# Altium PCB 美安微波红外报警探测-CS1237-V1.5.PCBDOC
Units mil, origin at the board's own origin, x right, y up, seen from the top; angles counter-clockwise.
Board outline 2360 x 2720.05 mil, 2 copper layers (Top Layer, Bottom Layer); 73 components, 50 nets, 205 pads, 60 vias.
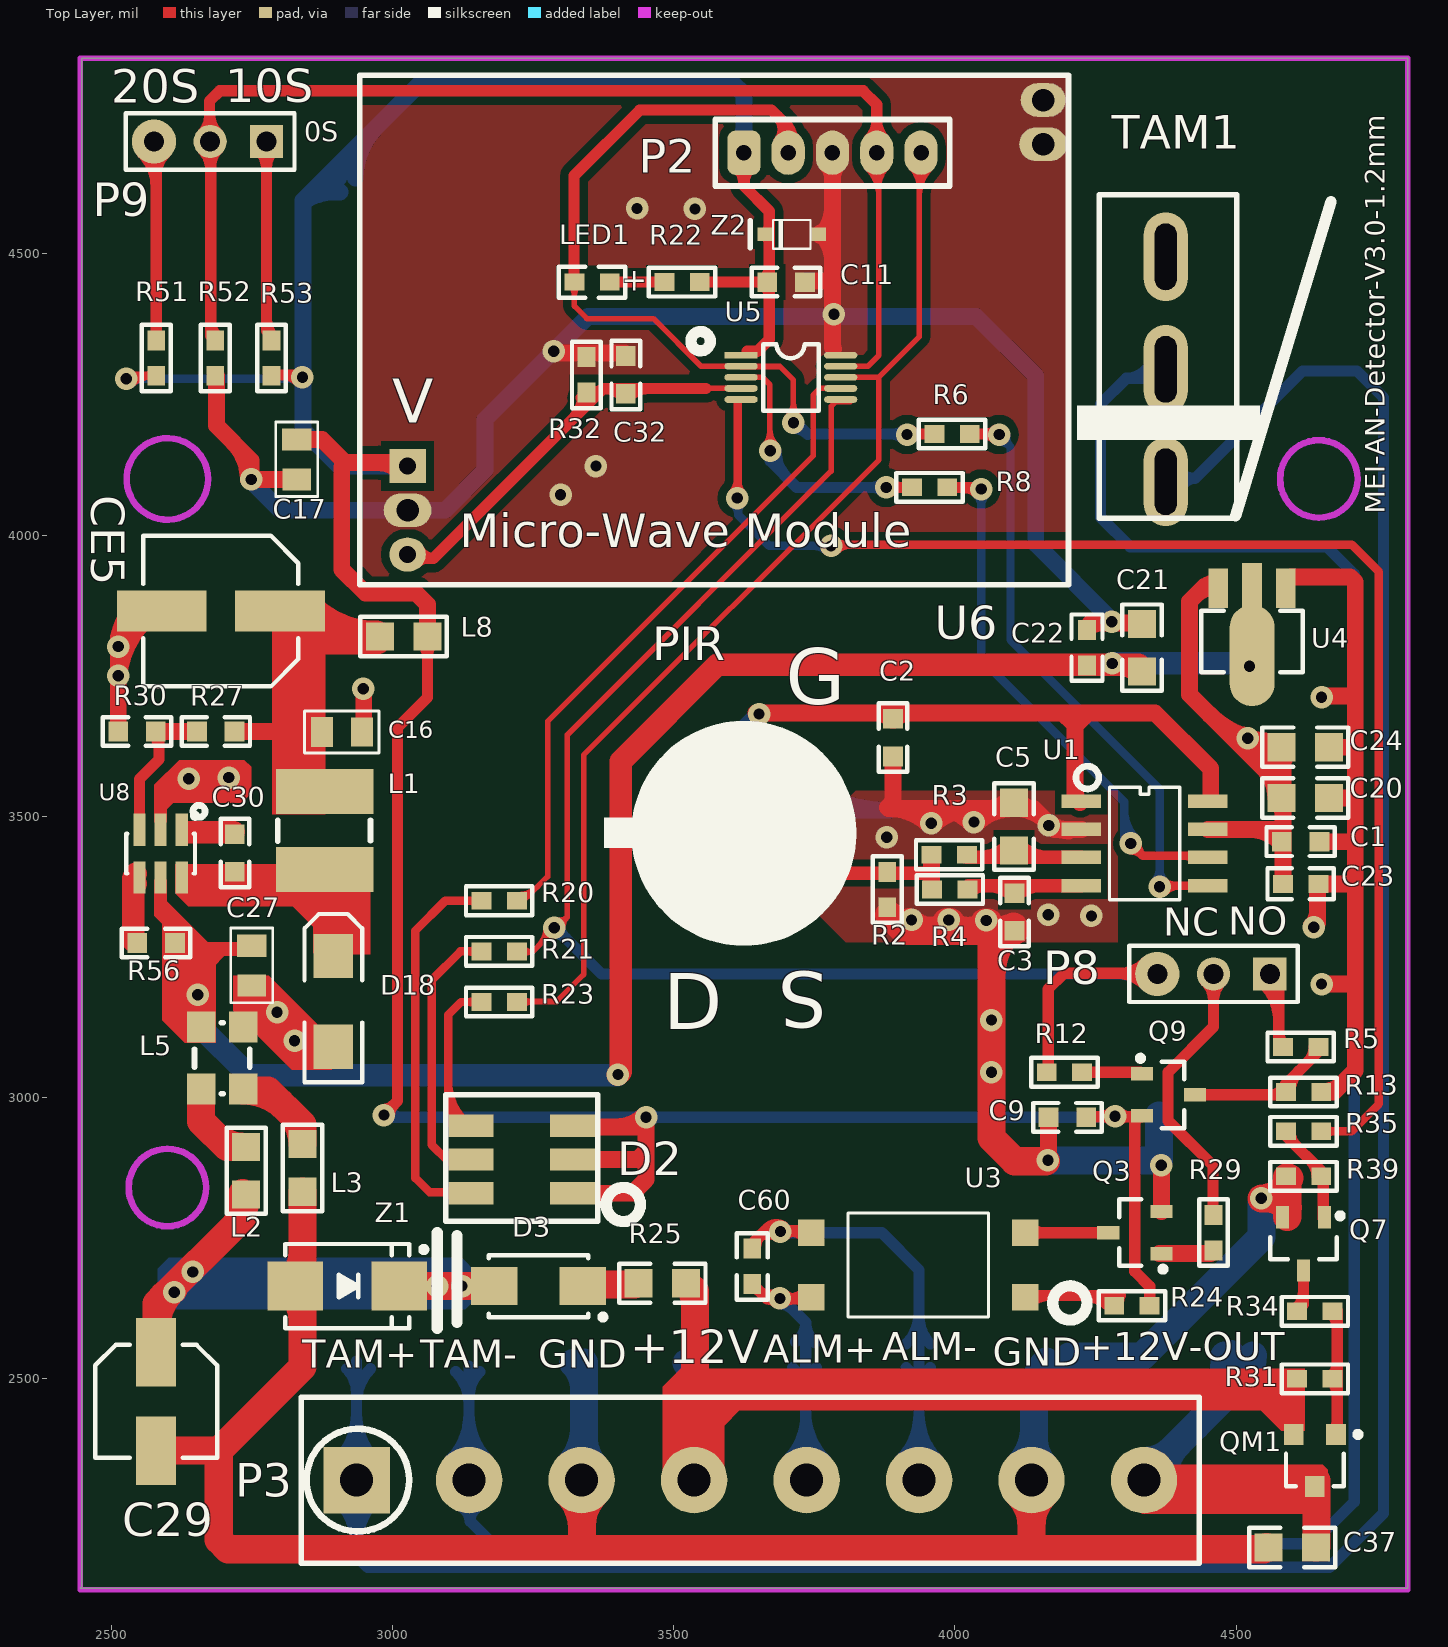
[diagram p0: Top Layer view]
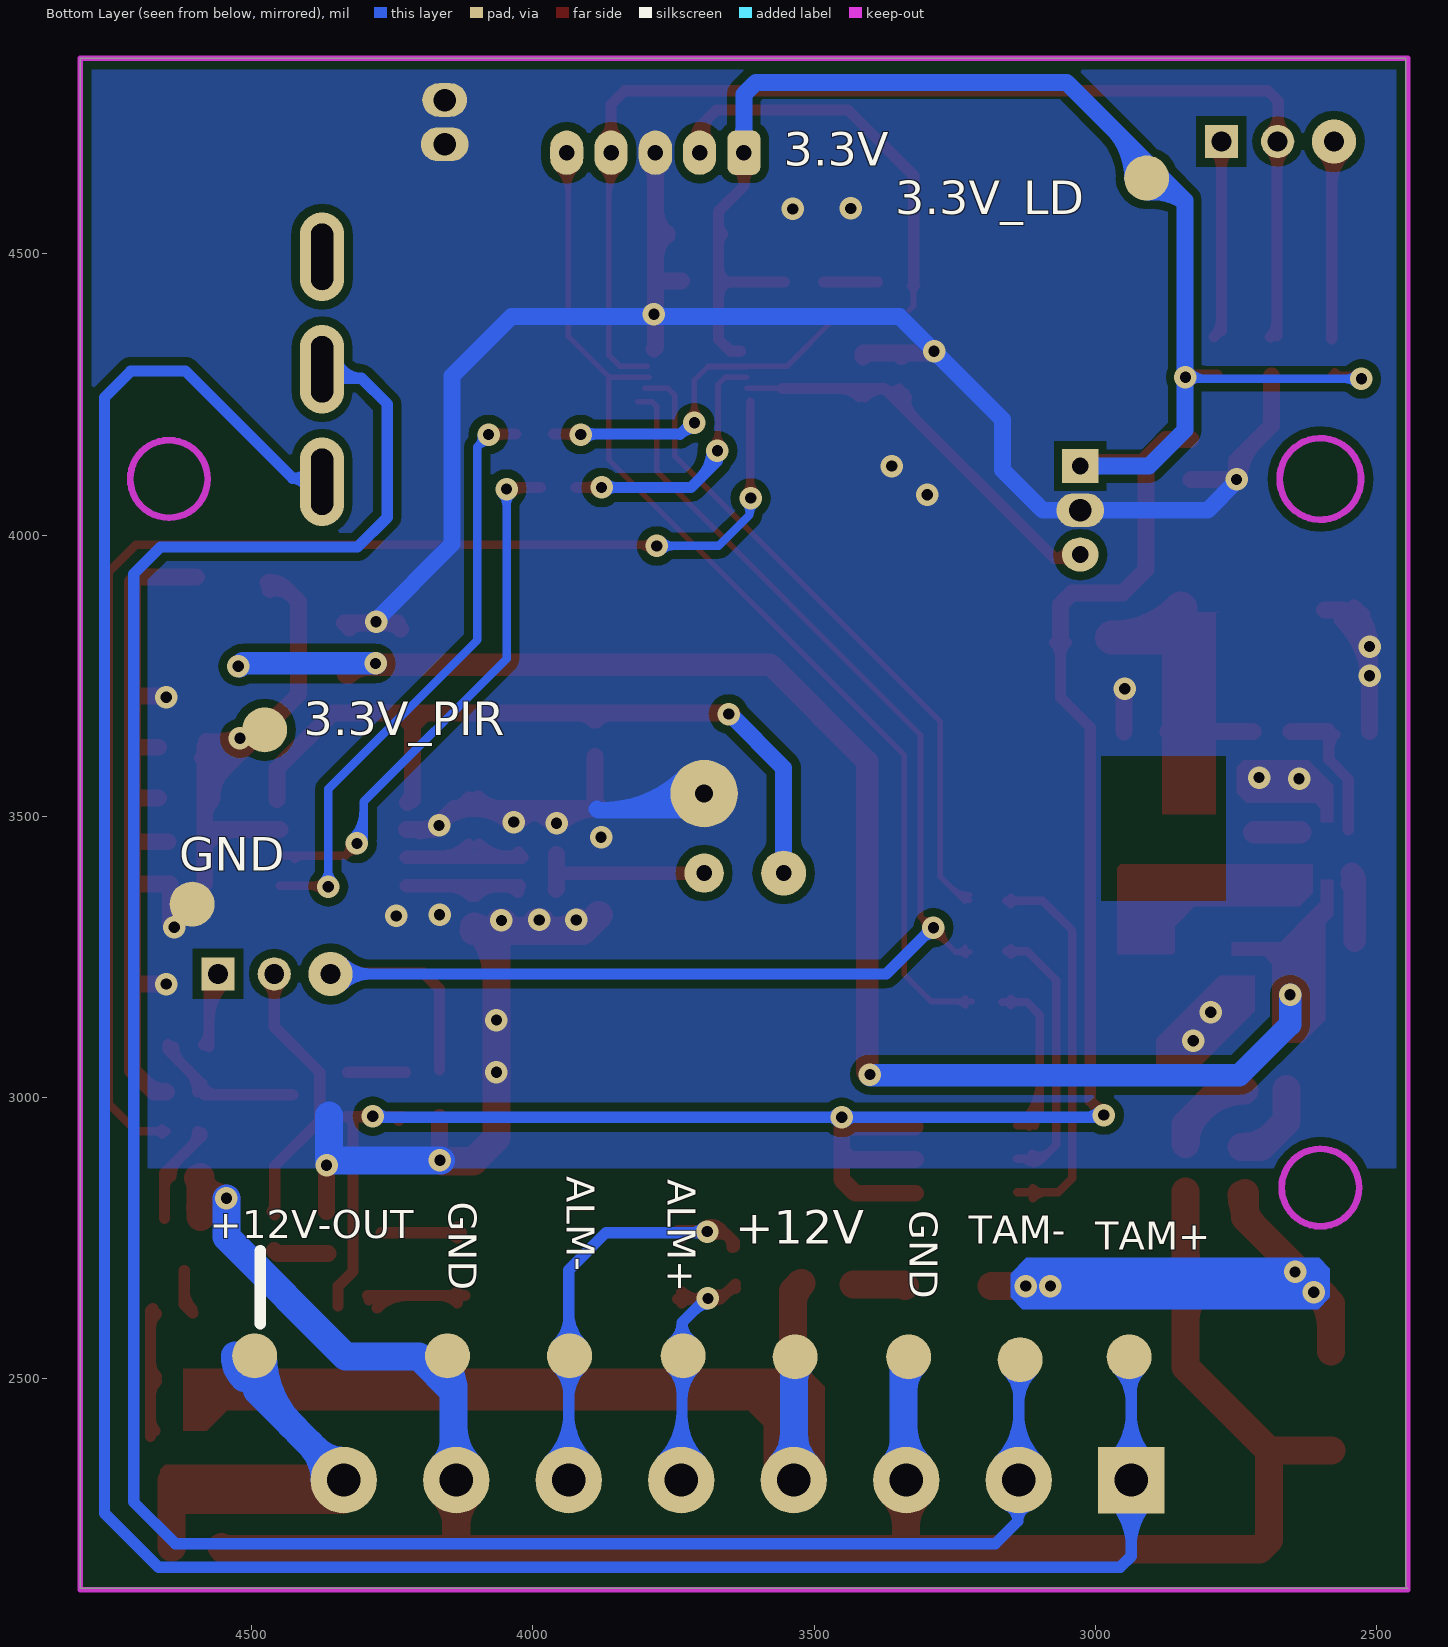
[diagram p1: Bottom Layer view, seen from below]

## Layer stack, top to bottom
Top Solder: solder mask 0.4, Solder Resist, Dk 3.5
Top Layer: signal copper 1.4
Dielectric1: dielectric 12.6, FR-4, Dk 4.8
Bottom Layer: signal copper 1.4
Bottom Solder: solder mask 0.4, Solder Resist, Dk 3.5

## Board outline
2450,4848.05 4805,4848.05 4805,2128 2445,2128 2448,2131 2448,4848.05

## Design rules (kind name [scope] priority, off if disabled: settings)
Clearance [All] p1: gap=7 ignorepadtopadclearanceinfootprint=FALSE except(0: Arc-Hole Track-Hole SMDPad-Hole THPad-Hole Via-Hole Fill-Hole Poly-Hole Region-Hole Text-Hole)
FabricationTestPointUsage TestPointUsage [All] p1: valid=0 allowmultiple=FALSE
FabricationTestpoint Testpoint [All] p1: side=3 testpointundercomponent=TRUE minsize=40 maxsize=100 preferedsize=60 minholesize=0 maxholesize=40 preferedholesize=32 testpointgrid=1 allowsidetop=TRUE allowsidebottom=TRUE usegrid=TRUE gridtolerance=0.01
PlaneConnect [All] p1: planeconnectstyle=Direct reliefexpansion=20 reliefentries=4 reliefconductorwidth=10 reliefairgap=10
PolygonConnect [All] p1: connectstyle=Direct reliefconductorwidth=10 reliefentries=4 polygonreliefangle="90 Angle" airgapwidth=10
RoutingVias [All] p1: holewidth=28 width=50 viastyle="Through Hole" minholewidth=20 minwidth=40 maxholewidth=28 maxwidth=50
SolderMaskExpansion [All] p1: expansion=4
Width [All] p1: maxlimit=60 minlimit=10 preferedwidth=12
27 further rules are at their usual default settings.

## Components (designator, comment, footprint, x,y, rotation, side; value= is the part's Value field where it differs from the comment)
C1 "100nF/50V" 0603 4615,3455 r180 top
C2 "100nF/50V" 0603 3890,3640 r90 top
C3 "100nF/50V" 0603 4106,3330 r90 top
C5 "10uF/10V" C0805 4105,3482 r270 top
C9 "10uF/6.3V" 0603 4200,2965 r180 top
C11 "100nF" 0603 3700,4450 r180 top
C16 "47uF/6.3V" 0805 2875,3650 r0 top
C17 "47uF/6.3V" 0805 2830,4170 r270 top
C20 "47uF/6.3V" C0805 4623,3533 r180 top
C21 "1uF/25V" C0805 4333,3800 r270 top
C22 "100nF/50V" C0603 4235,3800 r270 top
C23 "100nF/50V" C0603 4615,3380 r180 top
C24 "47uF/6.3V" C0805 4623,3623 r180 top
C27 "4.7uF/25V" 0805 2750,3270 r270 top
C29 "22uF/25V" CAP5.0X5.4 2580,2460 r270 top
C30 "100nF/50V" 0603 2720,3435 r90 top
C32 "100nF" 0603 3415,4285 r270 top
C37 "1uF/25V" C0805 4600,2200 r0 top
C60 "0.1uF/50V" C0603 3640,2700 r270 top
CE5 "470uF/6.3V" CAP6.3X5.4 2695,3865 r180 top
D2 "led三色共阴极灯" 三色灯 3225,2885 r180 top
D3 "SS14" SS14 3260,2665 r180 top
D18 "B230A" SMA 2900,3170 r90 top
L1 "4.7uH-CD43" CDRH3D16 2880,3475 r90 top
L2 "UPZ2012E102-1R5TF" R0805 2740,2870 r270 top
L3 "UPZ2012E102-1R5TF" R0805 2840,2875 r270 top
L5 "WCM3225F2SF-102T15" CMC-3225 2660,3015 r0 top
L8 "UPZ2012E102-1R5TF" R0805 3020,3820 r180 top
LED1 "LED" LED-0603 3355,4450 r180 top
P2 "CON5" PH2.0-5P 3625,4680 r0 top
P3 "Header 8" 5.08dip-8 2860,2320 r0 top
P8 "Header 3" HDR1X3 4560,3220 r180 top
P9 "Header 3" HDR1X3 2776,4700 r180 top
PIR "PIR-S305（2）/LHI968(2-German)/NAT802-2(4)" pir3 3625,3470 r225 top locked
Q3 "8050" 8050&8550 4320,2760 r180 top
Q7 "8050" 8050&8550 4620,2740 r270 top
Q9 "8550" 8050&8550 4380,3005 r0 top
QM1 "NCE3401AY" SOT-23 4640,2360 r180 top
R2 "100K 1%" R0603 3880,3370 r90 top
R3 "100K 1%" R0603 3990,3432 r180 top
R4 "1K 1%" R0603 3991,3370 r180 top
R5 "1K" R0603 4615,3090 r180 top
R6 "100R" R0603 3995,4180 r180 top
R8 "100R" R0603 3955,4085 r180 top
R12 "2K" R0603 4195,3045 r180 top
R13 "10K" R0603 4620,3010 r0 top
R20 "Res2" R0603 3190,3350 r180 top
R21 "Res2" R0603 3190,3260 r180 top
R22 "Res2" R0603 3515,4450 r180 top
R23 "Res2" R0603 3190,3170 r180 top
R24 "510" R0603 4315,2630 r0 top
R25 "10Ω" C0805 3480,2670 r0 top
R27 "49.9K 1%" 0603 2686,3651 r180 top
R29 "2K" R0603 4460,2760 r270 top
R30 "16.2K 1%" 0603 2546,3651 r180 top
R31 "2K" R0603 4640,2500 r180 top
R32 "100K" R0603 3345,4285 r270 top
R34 "2K" R0603 4640,2620 r0 top
R35 "2K" R0603 4620,2940 r180 top
R39 "10K" R0603 4620,2860 r0 top
R51 "12K" R0603 2580,4315 r270 top
R52 "12K/NA" R0603 2685,4315 r270 top
R53 "24K" R0603 2785,4315 r270 top
R56 "2.2K" 0603 2580,3275 r180 top
TAM1 "Header 3" KW12 4375,4095 r90 top
U1 "CS1237" SOP_8 4225,3527 r270 top
U3 "TLP627" TLP627 3960,2680 r90 top
U4 "HT7533" SOT-89 4525,3835 r270 top
U5 "EN8F156MS10-33" MSOP10-0.5 3620,4320 r0 top
U6 "LDMK" LDMK 3020,4060 r0 top
U8 "MP2359DJ/MP2459DJ/SY8201/SY8291" SOT23-6 2588,3434 r0 top
Z1 "SMBJ15A" SMB 2920,2665 r0 top
Z2 "PESD5V0S1BA-N" SOD-323 3710,4535 r180 top

## Footprints (in the part's own frame and the unit in brackets; to place one, negate y for a bottom-side part, rotate by r counter-clockwise, add the part's x,y. Pads: shape width x height; smd on the part's side, far side on the other; paste and mask are expansions set on the pad)
5.08dip-8 [mm]
  rect 3x3 hole 1.5: 1(1.94,0)
  round 3 hole 1.5: 2(7.02,0) 3(12.1,0) 4(17.18,0) 5(22.26,0) 6(27.34,0) 7(32.42,0) 8(37.5,0)
  silkscreen extent -0.56,-3.75 40,3.75
0603 [mil]
  rect 35x35 smd: 1(-33.46,0) 2(33.46,0)
  silkscreen extent -61,-25 61,25
0805 [mm]
  rect 1x1.35 smd: 1(0,0)
  rect 1x1.3 smd: 2(1.8,0)
  silkscreen extent -0.8,-0.95 2.58,0.95
8050&8550 [mm] "SOT23, 3-Leads, Body 2.90x2.45mm, Pitch 0.95mm, IPC Medium Density"
  rect 1x0.6 smd: 1(-1.2,0.95) 2(-1.2,-0.95) 3(1.2,0)
  silkscreen extent -1.39,-1.5 0.7,1.78, body extent -1.3,-1.5 1.3,1.5, height 1.1
C0603 [mm]
  rect 0.9x0.8 smd: 1(-0.8,0) 2(0.8,0)
  silkscreen extent -1.5,-0.7 1.5,0.7, body extent -0.8,-0.4 0.8,0.4, height 0.6
C0805 [mil]
  rect 50x50 smd: 1(-42.28,0) 2(42.28,0)
  silkscreen extent -77,-35 77,35, body extent -39,-24 39,24, height 47
CAP5.0X5.4 [mm] "Aluminum Electrolytic Capacitor, Body 4.90x5.30x5.50mm, IPC Low Density"
  rect 3.1x1.8 smd: 1(-2.225,0) 2(2.225,0)
  silkscreen extent -2.55,-2.75 2.55,2.75, body extent -2.75,-2.75 2.75,2.75, height 5.5
CAP6.3X5.4 [mm] "Aluminum Electrolytic Capacitor, Body 6.60x6.60x5.90mm, IPC Low Density"
  rect 4.05x1.85 smd: 1(-2.675,0) 2(2.675,0)
  silkscreen extent -3.5,-3.4 3.5,3.4, body extent -3.5,-3.4 3.5,3.4, height 5.9
CDRH3D16 [mil]
  rect 80x173.23 smd: 1(-69.06,0) 2(69.05,0)
  silkscreen extent -19,-81 18,84
CMC-3225 [mm]
  rect 1.3x1.4 smd: 1(0,0) 2(0,2.8) 3(1.9,0) 4(1.9,2.8)
  silkscreen extent -0.3,-0.2 2.2,3, body extent -0.3,-0.2 2.2,3, height 2.3
HDR1X3 [mm] "Connector; Header; 3 Position"
  rect 1.5x1.5 hole 0.9: 1(0,0)
  round 1.5 hole 0.9: 2(2.54,0)
  round 2 hole 0.9: 3(5.08,0)
  silkscreen extent -1.27,-1.27 6.35,1.27
KW12 [mm] "KW12"
  oval 4x2 hole 1 slot 3 at 0 deg: 1(0,0) 2(5.08,0) 2(10.16,0)
  silkscreen extent -1.65,-4.25 12.95,4
LDMK [mil] "LDMK"
  rect 65x60 hole 30: 1(7,62.99)
  oval 85x60 hole 40: 2(7,-15.75) 5(1137,635)
  oval 65x60 hole 30: 3(7,-94.49)
  oval 80x60 hole 40: 4(1137,713.74)
  silkscreen extent -78,-148 1182,758
LED-0603 [mm]
  rect 0.9x0.762 smd: 1(-0.8,0) 2(0.8,0)
  silkscreen extent -1.5,-0.7 1.5,0.7
MSOP10-0.5 [mm]
  rect 1.5x0.3 smd: 1(0,0)
  oval 1.5x0.3 smd: 2(0,-0.5) 3(0,-1) 4(0,-1.5) 5(0,-2) 6(4.5,-2) 7(4.5,-1.5) 8(4.5,-1) 9(4.5,-0.5) 10(4.5,0)
  silkscreen extent 1,-2.5 3.5,0.5
PH2.0-5P [mm]
  rrect50% 1.5x2 hole 0.7: 1(0,0)
  oval 1.5x2 hole 0.7: 2(2,0) 3(4,0) 4(6,0) 5(8,0)
  silkscreen extent -1.3,-1.5 9.3,1.5, body extent -0.25,-0.25 6.25,0.25, height 5.5
pir3 [mil]
  round 30 / inner round 80 / far side round 80 hole 28: 1(100,0)
  round 30 / inner round 70 / far side round 70 hole 28: 2(0,100)
  round 36 / inner round 120 / far side round 120 hole 32: 3(-100,0)
  silkscreen extent -168,-168 168,168
R0603 [mm]
  rect 0.9x0.8 smd: 1(-0.8,0) 2(0.8,0)
  silkscreen extent -1.5,-0.65 1.5,0.65, body extent -0.8,-0.4 0.8,0.4, height 0.45
R0805 [mil]
  rect 50x50 smd: 1(-42.28,0) 2(42.28,0)
  silkscreen extent -77,-35 77,35, body extent -39,-25 39,25, height 22
SMA [mm] "SMA"
  rect 2x1.8 smd: 1(-2.025,0.127) 2(2.075,0.127)
  silkscreen extent -3.62,-1.17 3.98,1.43
SMB [mm] "4.7*3.9*2.2mm(长宽高，不包括引脚）"
  rect 2.5x2.2 smd: A(-2.35,0) K(2.35,0)
  silkscreen extent -2.8,-1.9 3.58,1.9, body extent -2.63,-1.8 2.67,1.8, height 2.35
SOD-323 [mm]
  rect 0.7x0.6 smd: 1(-1.2,0) 2(1.2,0)
  silkscreen extent -0.85,-0.65 0.85,0.65
SOP_8 [mil]
  rect 24x70 smd: 1(0,0) 2(50,0) 3(100,0) 4(150,0) 5(150,225) 6(100,225) 7(50,225) 8(0,225)
  silkscreen extent -25,50 175,175
SOT23-6 [mm] "SOT23-6"
  rect 0.55x1.45 smd: 1(0.95,1.075) 2(0,1.075) 3(-0.95,1.075) 4(-0.95,-1.075) 5(0,-1.075) 6(0.95,-1.075)
  silkscreen extent -1.55,-0.9 1.73,1.88, body extent -1.4,-1.19 1.4,1.23, height 1.08
SOT-23 [mm]
  rect 0.9x0.95 smd: 1(-0.95,-1.048) 2(0.95,-1.048) 3(0,1.302)
  silkscreen extent -2.07,-1.17 1.3,1.3
SOT-89 [mil] "7533.7550"
  rect 70x35 smd: 1(-71,63.5) 3(-71,-56.5)
  rect 90x35 smd: 2(-71,3.5)
  oval 180x80 smd: 2(49,3.5)
  silkscreen extent -31,-86 79,94
SS14 [mm] "SODFL, 2-Leads, Body 2.67x5.29mm, IPC Medium Density"
  rect 2.1x1.7 smd: 1(-2,0) 2(2,0)
  silkscreen extent -3.03,-1.4 2.25,1.52, body extent -2.25,-1.4 2.25,1.4, height 2.42
TLP627 [mil]
  rect 47.24x47.24 smd: 1(-35,-165) 2(80,-165) 3(80,215) 4(-35,215)
  silkscreen extent -70,-100 115,150
三色灯 [mil]
  rect 80x39.37 smd: 1(-95,55) 2(-95,-5) 3(-95,-65) 4(85,55) 5(85,-5) 6(85,-65)
  silkscreen extent -140,-120 130,105

## Part data
C1 C2 C3 C5 C9 C20 C21 C22 C23 C24 C30 C32 C37 C60: library part Cap, "Capacitor"
C11 C16 C17 C27: library part "Cap Semi", "Capacitor (Semiconductor SIM Model)"
C29: library part "Cap Pol2", "Polarized Capacitor (Axial)"
CE5: library part "Cap Pol1", "Polarized Capacitor (Radial)"
D18: library part "Diode 1N4007", "1 Amp General Purpose Rectifier"
L1 L2 L3 L8: library part Inductor, "Inductor"
L5: library part Trans, "Transformer"
LED1: library part LED0
P2: "Connector"
P3: "Header, 8-Pin"
P8 P9 TAM1: "Header, 3-Pin"
PIR: library part PIR
Q3 Q7: library part 2N3904, "NPN General Purpose Amplifier"
Q9: library part 2N3906, "PNP General Purpose Amplifier"
QM1: library part "MOSFET P"
R2 R3 R4 R5 R6 R8 R13 R24 R25 R29 R30 R31 R32 R34 R35 R39 R51 R52 R53: library part Res2, "Resistor"
R12 R27 R56: library part Res3, "Resistor"
R20 R21 R22 R23: "Resistor"
U4: library part 12S33
U5: library part EN8F156MS10
U8: library part SY8120B
Z1 Z2: library part "D Zener", "Zener Diode"

## Free pads (board coordinates)
  round 80 smd far side: 0(2909,4635) 0(2940,2539) 0(3134,2534) 0(3332,2539) 0(3534,2539) 0(3733,2541) 0(3935,2541) 0(4152,2541) 0(4477,3654) 0(4495,2541) 0(4606,3344)

## Via types
v1: diameter 40, hole 20, Top Layer to Bottom Layer, 60 vias

## Nets (pads, with @x,y where several pads share a name; then routed paths per layer and width w, separated by ;. In a path a pad name is that pad's centre, name@x,y a point inside that pad or via, vN(x,y) a via of type N, cw(c..) or ccw(c..) an arc to the next point about the centre after c; other vN are vias at no path point)
3.3V_LD: C9.1 C11.2 C17.1 D2.1 D2.2 D2.3 L8.1 P2.1 pad.0@2909,4635 Q9.2 R22.1 R24.2 R51.2 R53.2 U5.1 U6.1 Z2.2 | length 7611.9
  Top Layer w12: v1@2832,4285 v1@2837,4280
  Top Layer w15: v1@2532,4277 2538.5,4283.5 R51.2 ; v1@2535.84,4269.16 cw(c2570.47,4234.53) R51.2@2570.47,4283.5 ; R51.2@2574.17,4277.67 ccw(c2560.09,4263.59) 2560.09,4283.5 ccw(c2560.09,4303.42) R51.2@2574.17,4289.34
  Top Layer w20: R53.2@2784,4285 v1@2832,4285 ; 2806.2,4285 cw(c2806.2,4247.2) v1@2832.93,4273.93 ; v1@2985,2979 ccw(c2985,3000.73) 3000.36,2985.36 ; v1@2989,2974 3009,2994 3009,3658 3062.28,3711.28 L8.1@3062.28,3825 ; v1@2995,2969 cw(c3021.56,2969) 3002.78,2987.78 ; L8.1@3051.67,3809.39 cw(c3026.06,3783.79) 3062.28,3783.79 cw(c3098.49,3783.79) L8.1@3072.88,3809.39 ; R22.1@3553,4450 C11.2 ; P2.1@3611.19,4656.35 cw(c3577.86,4623.01) 3625,4623.01 cw(c3672.14,4623.01) P2.1@3638.81,4656.35 ; P2.1@3625,4675 3625,4621 3670,4576 3670,4348 3649,4327 3631,4327 ; Z2.2@3663.44,4533.72 cw(c3647.62,4517.89) 3670,4517.89 ; Z2.2@3663.44,4536.28 ccw(c3647.62,4552.11) 3670,4552.11 ; 3670,4423.53 ccw(c3640.07,4423.53) 3661.23,4444.7 ccw(c3648.43,4431.89) 3648.43,4450 ccw(c3648.43,4468.11) 3661.23,4455.3 ccw(c3640.07,4476.47) 3670,4476.47 ; C9.1@4231,2966 Q9.2@4332,2966 ; C9.1@4238.77,2959.7 cw(c4253.98,2944.48) 4253.98,2966 ; 4258.44,2966 ccw(c4258.44,2993.56) v1@4277.93,2974.07 ; 4263.27,2966 cw(c4263.27,2945.27) v1@4277.93,2959.93 ; v1@4292.07,2959.93 cw(c4306.73,2945.27) 4306.73,2966 ; v1@4292.07,2974.07 ccw(c4311.56,2993.56) 4311.56,2966 ; 4320,2951.44 cw(c4341.04,2951.44) Q9.2@4326.16,2966.32 ; Q9.2@4320,2962 4320,2691 4346.5,2664.5 R24.2
  Top Layer w30: C17.1 2875,4170 2916,4129 U6.1@3028,4129 ; 2918,4129 2910,4121 2910,3939 2952,3897 3042,3897 3062.28,3876.72 L8.1@3062.28,3822 ; 2973.78,4129 cw(c2973.78,4072.27) U6.1@3013.89,4112.39 ; D2.1 3427,2830 3451,2854 v1@3451,2968 ; D2.2 3436,2890 3451,2905 ; D2.3@3321,2948 3437,2948 v1@3451,2962 ; 3397.89,2948 ccw(c3397.89,3018.11) v1@3447.46,2968.54
  Bottom Layer w12: v1@2830.1,4271.1 cw(c2815.86,4256.86) 2836,4256.86 ; 2836,4189 v1@2836,4275 ; 2836,4237.54 cw(c2883.46,4237.54) v1@2849.9,4271.1
  Bottom Layer w15: v1(2527,4278) 2840,4278 v1@2841,4279 ; v1@2535.84,4269.16 cw(c2557.18,4247.82) 2557.18,4278 cw(c2557.18,4308.18) v1@2535.84,4286.84 ; 2802.58,4278 ccw(c2802.58,4318.42) v1@2831.16,4289.84 ; 2817.07,4278 cw(c2817.07,4258.06) v1@2831.16,4272.16
  Bottom Layer w20: v1@2982,2965 v1@4286,2965 ; v1@2992.07,2976.07 ccw(c3018.8,3002.8) 3018.8,2965 ; v1@3443.93,2957.93 ccw(c3426.86,2940.86) 3426.86,2965 ccw(c3426.86,2989.14) v1@3443.93,2972.07 ; v1@3458.07,2957.93 cw(c3475.14,2940.86) 3475.14,2965 cw(c3475.14,2989.14) v1@3458.07,2972.07 ; 4256.03,2965 ccw(c4256.03,2995.97) v1@4277.93,2974.07
  Bottom Layer w30: 2842.53,4593.7 cw(c2898.14,4509.86) pad.0@2906.84,4610.09 ; pad.0@2904,4635 cw(c2959.53,4635) 2920.26,4674.26 ; pad.0@2934,4635 cw(c3061.95,4635) 2971.48,4725.48 ; U6.1@3013.89,4112.39 ccw(c2988.29,4086.78) 2988.29,4122.99 ccw(c2988.29,4159.21) U6.1@3013.89,4133.6 ; U6.1 2905.01,4122.99 2841,4187 2841,4595 3051,4805 3604,4805 3625,4784 P2.1@3625,4673 ; P2.1@3614.73,4700.12 ccw(c3589.93,4724.92) 3625,4724.92 ccw(c3660.07,4724.92) P2.1@3635.27,4700.12
  other v1: 3451,2965 4285,2967 2985,2969 2840,4281
+12V: P3.4 pad.0@3534,2539 QM1.2 R25.2 R31.2 | length 876.6
  Top Layer w50: P3.4@3512.3,2344.08 ccw(c3450.25,2406.13) 3538,2406.13 ; R25.2 cw(c3484.31,2632.04) 3538,2632.04 ; R25.2@3525,2669 3538,2656 P3.4@3538,2332 ; 3538,2398.3 ccw(c3614.68,2398.3) P3.4@3560.46,2344.08
  Bottom Layer w50: P3.4@3512.3,2344.08 ccw(c3455.07,2401.3) 3536,2401.3 ; pad.0@3523.39,2528.39 cw(c3492.96,2497.96) 3536,2497.96 ; P3.4@3536,2331 pad.0@3536,2531 ; 3536,2403.13 ccw(c3619.51,2403.13) P3.4@3560.46,2344.08
+12V_LDO: C21.2 C22.2 C27.1 L5.2 R56.1 U4.2 U8.5 | length 2673.1
  Top Layer w40: v1(3401,3041) 3406,3046 3406,3598 3578,3770 C21.2@4327,3770 ; v1@4291.29,3770 cw(c4291.29,3716.02) C21.2@4329.46,3754.19
  Bottom Layer w40: v1(2654,3183) 2654,3130 2744,3040 v1@3400,3040 ; v1(4280,3772) 4516,3772 v1@4521,3767
  other v1: 4524,3767
+12VOUT: C37.2 P3.8 pad.0@4495,2541 QM1.3 | length 742.5
  Top Layer w50: C37.2 4643,2200.72 QM1.3@4643,2319
  Bottom Layer w50: P3.8@4336.38,2354.06 ccw(c4336.38,2425.7) 4387.04,2375.04 ; P3.8@4349,2330 4349,2337 4491,2479 pad.0@4491,2544 ; P3.8@4370.43,2320 cw(c4463.22,2320) 4397.61,2385.61 ; 4428.38,2416.38 ccw(c4303.76,2541) pad.0@4480,2541 ; 4491,2495.13 cw(c4540.87,2495.13) pad.0@4505.61,2530.39 ; 4513.74,2501.74 ccw(c4474.47,2541) pad.0@4530,2541
ALARM+: C60.2 P3.5 pad.0@3733,2541 U3.4 | length 1148.1
  Top Layer w20: C60.2@3640,2660.79 cw(c3640,2642.16) C60.2@3653.17,2655.33 ; C60.2 3666.5,2642 ; C60.2@3651.75,2656.76 ccw(c3671.37,2676.37) v1@3684.33,2651.84 ; 3667.27,2642 cw(c3667.27,2621.27) v1@3681.93,2635.93 ; v1@3681.11,2649.14 cw(c3666.51,2660.5) 3666.51,2642 ; v1@3696.07,2635.93 cw(c3710.73,2621.27) 3710.73,2642 ; v1@3696.07,2650.07 ccw(c3715.56,2669.56) 3715.56,2642 ; v1@3704.87,2642 ccw(c3704.87,2685.13) U3.4@3735.37,2654.63 ; 3719.36,2642 cw(c3719.36,2619.36) U3.4@3735.37,2635.37 ; U3.4@3743,2642 3666.5,2642
  Bottom Layer w20: v1@3687,2648 3735,2600 ; v1@3689,2633 cw(c3689,2601.62) 3711.19,2623.81 ; P3.5@3701.69,2354.69 ccw(c3621.28,2435.1) 3735,2435.1 ; pad.0@3711.79,2519.79 cw(c3655.75,2463.75) 3735,2463.75 ; P3.5@3715.83,2340.55 ccw(c3669.56,2386.82) 3735,2386.82 ; pad.0@3716.64,2566.15 ccw(c3694.61,2600) 3735,2600 ; P3.5@3735,2322 3735,2600 ; 3735,2393.47 ccw(c3809.85,2393.47) P3.5@3756.92,2340.55 ; 3735,2441.76 ccw(c3858.13,2441.76) P3.5@3771.07,2354.69 ; 3735,2473.4 cw(c3800.6,2473.4) pad.0@3754.21,2519.79 ; pad.0@3751.97,2564.24 cw(c3781.15,2600) 3735,2600
  other v1: 3689,2643
ALARM-: C60.1 P3.6 pad.0@3935,2541 U3.3 | length 1531.2
  Top Layer w20: C60.1@3642,2735 3642,2743 3663,2764 ; C60.1@3645.75,2733.46 cw(c3677.82,2733.46) 3655.14,2756.14 ; 3648.5,2749.5 cw(c3669.11,2728.89) v1@3684.66,2753.54 ; 3658.97,2759.97 cw(c3688.15,2730.79) v1@3690.59,2771.98 ; 3666.2,2767.2 cw(c3682.81,2750.6) v1@3695.34,2770.46 ; v1@3682.58,2755.3 ccw(c3663,2737.63) 3663,2764 ; v1@3697.07,2754.93 cw(c3718.97,2733.03) 3718.97,2764 ; v1@3702.46,2764 cw(c3702.46,2717.46) U3.3@3735.37,2750.37 ; U3.3@3743,2764 3663,2764
  Bottom Layer w20: v1@3686,2760 3870,2760 3936.38,2693.62 P3.6 ; v1@3697.07,2769.07 ccw(c3718.97,2790.97) 3718.97,2760 ; P3.6@3901.69,2354.69 ccw(c3817.95,2438.43) 3936.38,2438.43 ccw(c4054.81,2438.43) P3.6@3971.07,2354.69 ; pad.0@3913.79,2519.79 cw(c3859.25,2465.25) 3936.38,2465.25 ; pad.0@3913.79,2562.21 ccw(c3859.25,2616.75) 3936.38,2616.75 ; P3.6@3915.83,2340.55 ccw(c3866.23,2390.15) 3936.38,2390.15 ccw(c4006.52,2390.15) P3.6@3956.92,2340.55 ; 3936.38,2471.9 cw(c4004.1,2471.9) pad.0@3956.21,2519.79 ; 3936.38,2610.1 ccw(c4004.1,2610.1) pad.0@3956.21,2562.21
  other v1: 3690,2762
ALARM_12V: R35.1 U5.5 | length 2670.6
  Top Layer w15: v1@3604.16,4074.84 ccw(c3580.41,4098.59) 3614,4098.59 ; v1@3614,4066 U5.5@3614,4237 ; 3614,4093.76 ccw(c3640.76,4093.76) v1@3621.84,4074.84 ; v1@3777,3983 4706,3983 4754,3935 4754,2989 4705,2940 R35.1 ; v1@3788.84,3972.16 cw(c3815.01,3945.99) 3815.01,3983 ; v1@3788.84,3989.84 ccw(c3805.35,4006.35) 3805.35,3983 ; R35.1@4659.3,2934.17 cw(c4673.38,2920.09) 4673.38,2940 cw(c4673.38,2959.91) R35.1@4659.3,2945.83
  Bottom Layer w15: v1@3605.22,4056.22 cw(c3589.08,4035.94) 3615,4035.94 ; 3615,4040.65 cw(c3638.35,4040.65) v1@3621.84,4057.16 ; v1@3615,4067 3615,4036 3670,3981 v1(3780,3981) ; v1@3771.16,3972.16 ccw(c3749.82,3950.82) 3749.82,3981 ccw(c3749.82,4011.18) v1@3771.16,3989.84
  other v1: 3613,4066
ALARM_LED: P8.3 R12.2 R21.1 U5.6 | length 3095.4
  Top Layer w10: R21.1@3224,3259 3249,3259 ; R21.1@3231.06,3252.4 cw(c3247,3236.47) 3247,3259 ; R21.1@3231.63,3266.99 ccw(c3249,3281.88) 3249,3259 ; 3259.56,3269.56 ccw(c3227.13,3302) v1@3273,3302 ; 3269.22,3279.22 cw(c3288,3260.44) v1@3288,3287 ; v1@3292.37,3316.35 ccw(c3297.81,3334.19) 3311,3321 ; v1@3303,3302 cw(c3329.56,3302) 3310.78,3320.78 ; U5.6@3814,4237 3788,4237 3780,4229 3780,4114 3311,3645 3311,3321 ; 3249,3259 3311,3321
  Top Layer w20: R12.2@4166,3049 4166,3193 4194,3221 P8.3@4355,3221 ; 4286.68,3221 cw(c4286.68,3146.68) P8.3@4339.23,3199.23 ; 4291.51,3221 ccw(c4291.51,3288.49) P8.3@4339.23,3240.77
  Bottom Layer w20: v1@3288,3292 cw(c3288,3263.03) 3308.49,3283.51 ; v1@3291,3301 3372,3220 P8.3 ; v1@3298,3302 ccw(c3317.31,3302) 3303.66,3288.34 ; P8.3@4339.23,3199.23 ccw(c4289.09,3149.09) 4289.09,3220 ccw(c4289.09,3290.91) P8.3@4339.23,3240.77
  other v1: 3288,3302
ALARM_SET: P8.2 R29.1 | length 579.3
  Top Layer w20: P8.2@4446.19,3206.19 cw(c4412.86,3172.86) 4460,3172.86 cw(c4507.14,3172.86) P8.2@4473.81,3206.19 ; R29.1@4459,2792 4459,2879 4379,2959 4379,3045 4460,3126 P8.2@4460,3217 ; 4459,2809.76 ccw(c4476.29,2809.76) R29.1@4464.06,2797.53
DELAY: P2.5 R23.1 U5.8 | length 2090.4
  Top Layer w10: R23.1@3219,3171 3292,3171 3340,3219 3340,3609 3865,4134 3865,4281 3937,4353 P2.5@3937,4680 ; R23.1@3231.06,3162.4 cw(c3251.83,3141.64) 3251.83,3171 ; R23.1@3231.06,3177.6 ccw(c3247,3193.53) 3247,3171 ; U5.8@3793,4280.63 3865,4280.63 ; P2.5@3922.62,4652.81 cw(c3887.89,4618.09) 3937,4618.09 ; 3937,4603.8 cw(c4006.32,4603.8) P2.5@3957.3,4652.81 ; 3937,4627.94 cw(c3982.18,4627.94) P2.5@3950.23,4659.88
DIST: P2.4 P9.2 R52.1 U5.9 | length 2552.7
  Top Layer w10: U5.9 3845.31,4300.31 3865,4320 P2.4@3865,4712 ; P2.4@3843.88,4652.81 cw(c3792.88,4601.82) 3865,4601.82 ; P2.4@3850.95,4659.88 cw(c3817.02,4625.96) 3865,4625.96 ; 3865,4620.07 cw(c3911.31,4620.07) P2.4@3878.56,4652.81
  Top Layer w20: P9.2@2662.19,4686.19 cw(c2626.44,4650.44) 2677,4650.44 ; P9.2@2662.19,4713.81 ccw(c2631.27,4744.73) 2675,4744.73 ; P9.2@2675,4706 2675,4772 2693,4790 3837,4790 3861.22,4765.78 P2.4 ; 2675,4749.56 ccw(c2725.56,4749.56) P9.2@2689.81,4713.81 ; R52.1@2677,4354 P9.2@2677,4698 ; 2677,4381.66 ccw(c2718.19,4381.66) R52.1@2689.06,4352.53 ; 2677,4655.27 cw(c2720.73,4655.27) P9.2@2689.81,4686.19 ; P2.4@3847.41,4703.65 ccw(c3814.08,4736.99) 3861.22,4736.99 ccw(c3908.36,4736.99) P2.4@3875.03,4703.65
GND: C1.1 C2.1 C3.1 C5.1 C9.2 C11.1 C16.2 C17.2 C20.1 C21.1 C22.1 C23.1 C24.1 C27.2 C32.1 CE5.2 D18.1 L5.4 P2.3 pad.0@4606,3344 PIR.3 Q3.2 R2.1 R13.2 R30.2 R32.1 R52.2 U1.2 U4.1 U5.10 U6.2 U6.4 U6.5 U8.2 Z2.1 | length 8907.8
  Top Layer w30: R30.2 2512.54,3819.54 2560,3867 CE5.2@2593,3867 ; v1@2512.54,3731.59 cw(c2679.79,3731.59) CE5.2@2561.52,3849.86 ; v1@2512.54,3804.02 cw(c2607.36,3804.02) CE5.2@2540.31,3871.07 ; v1@2512.54,3808.32 cw(c2547.81,3808.32) CE5.2@2546.92,3843.59 ; v1@2517.54,3802 cw(c2571.94,3802) CE5.2@2533.47,3840.47 ; 2518.35,3825.35 ccw(c2495.69,3848.01) CE5.2@2526.07,3858.19 ; R52.2@2687,4283 2687,4195 2749,4133 v1(2749,4099.13) ; 2716.52,4165.48 cw(c2650.17,4099.13) v1@2744,4099.13 ; v1@2744.13,4099.13 C17.2 ; C16.2@2949,3650 v1@2949,3729 ; v1@3287,4324 C32.1@3413,4324 ; R32.1@3329.83,4324 cw(c3329.83,4303.29) R32.1@3344.47,4317.94 ; R32.1@3345.53,4317.94 cw(c3360.17,4303.29) R32.1@3360.17,4324 ; 3395.6,4324 cw(c3395.6,4299.06) C32.1@3413.23,4316.7 ; C11.1@3736,4452 3778,4452 ; Z2.1@3761.47,4532.75 ccw(c3710.74,4583.47) 3782.48,4583.47 ; Z2.1@3761.47,4537.25 cw(c3710.74,4486.53) 3782.48,4486.53 ; P2.3@3772.21,4659.88 cw(c3747.41,4635.08) 3782.48,4635.08 cw(c3817.55,4635.08) P2.3@3792.75,4659.88 ; P2.3 3782.48,4333.52 3784.78,4331.22 ; 3880,3516 3882,3514 4140,3514 ; 3881.46,3514.54 ccw(c3860.86,3535.14) 3890,3535.14 ; 3883.16,3514 cw(c3883.16,3413.16) v1@3954.46,3484.46 ; 3890,3515 C2.1 ; 3940.32,3505.68 cw(c3960.41,3485.59) 3960.41,3514 ; 3955.59,3514 cw(c3955.59,3485.59) 3975.68,3505.68 ; v1@3961.54,3484.46 cw(c4032.84,3413.16) 4032.84,3514 ; 3963.99,3514 cw(c3963.99,3419.99) v1@4030.46,3486.46 ; 4016.32,3507.68 cw(c4031.59,3492.41) 4031.59,3514 ; 4036.41,3514 cw(c4036.41,3492.41) 4051.68,3507.68 ; v1@4037.54,3486.46 cw(c4104.01,3419.99) C5.1@4104.01,3514 ; 4056.05,3514 ccw(c4056.05,3573.23) C5.1@4097.93,3531.35 ; C5.1@4105,3514.28 cw(c4105,3430.44) v1@4164.28,3489.72 ; C5.1@4107.26,3514.54 cw(c4118.2,3467.48) 4152.36,3501.64 ; C5.1@4113.68,3529.25 ccw(c4140,3544.34) 4140,3514 ; v1@4164.44,3489.56 ccw(c4202,3527.11) U1.2@4202,3474 ; v1@4166.54,2890.46 C9.2 ; v1@4170.54,3487.54 ccw(c4195.97,3512.97) U1.2@4195.97,3477 ; U1.2 4177,3477 4140,3514 ; C22.1@4235.53,3832.94 cw(c4262.24,3806.22) v1@4262.24,3844 ; C22.1@4241,3844 C21.1@4335,3844 ; 4304.7,3844 cw(c4304.7,3813.97) C21.1@4325.93,3835.2 ; Q3.2 v1@4367.24,2881.24 ; U4.1@4598,3926 4703,3926 4712,3917 4712,3048 4674,3010 R13.2 ; v1@4634.46,3306.54 ccw(c4609.03,3331.97) 4645,3331.97 ; v1@4645,3310 C23.1@4645,3380 ; C23.1 4709,3380 ; C1.1 4709,3455 ; v1@4650,3714 4709,3714 ; R13.2@4653.46,3010.75 ccw(c4653.46,3062.13) 4689.8,3025.8 ; v1@4655,3202 4712,3202 ; C20.1 4709,3533 ; C24.1 4712,3623
  Top Layer w50: R2.1@3883,3325 3911.46,3296.54 C3.1 ; v1@3919.46,3312.46 ccw(c3957.92,3350.92) 3957.92,3296.54 ; 3954.08,3296.54 ccw(c3954.08,3350.92) v1@3992.54,3312.46 ; v1@3985.46,3312.46 ccw(c4023.92,3350.92) 4023.92,3296.54 ; 4023.49,3296.54 ccw(c4023.49,3347.51) v1@4059.54,3311.46 ; v1@4052.46,3311.46 ccw(c4088.51,3347.51) C3.1@4088.51,3296.54 ; 4065,3215.66 cw(c4186.88,3215.66) C3.1@4100.7,3301.84 ; 4065,3255.53 cw(c4114.34,3255.53) C3.1@4104.5,3303.89 ; 4065,3296 4065,2928 4106,2887 v1@4162,2887
  Bottom Layer w30: v1@2748,4097 2800.75,4044.25 3093.25,4044.25 3165,4116 3165,4206 3348,4389 4038,4389 4144,4283 4144,3984 v1@4282,3846 ; U6.2@3013.89,4033.65 ccw(c2988.29,4008.04) 2988.29,4044.25 ccw(c2988.29,4080.47) U6.2@3013.89,4054.86 ; U6.2@3040.11,4033.65 cw(c3065.71,4008.04) 3065.71,4044.25 cw(c3065.71,4080.47) U6.2@3040.11,4054.86 ; PIR.3@3696,3537 3722,3511 3884,3511 3886,3513 ; PIR.3@3706.32,3551.32 ccw(c3803.65,3648.65) 3803.65,3511 ; PIR.3@3727.53,3572.53 ccw(c3876.08,3721.08) 3876.08,3511 ; 3763.27,4389 ccw(c3763.27,4414.73) v1@3781.46,4396.54 ; v1@3788.54,4396.54 ccw(c3806.73,4414.73) 3806.73,4389 ; v1@4363,2888 v1@4368,2883
  Bottom Layer w50: v1@4164,2888 4363,2888 4363,2968
  other v1: 4367,2880 4165.54,2888.46 4065,3045 2826,3101 4065,3138 2795,3152 4652,3202 4638,3303 4056,3315 3923,3316 3989,3316 4243,3323 4166,3325 3879,3463 4167,3484 3958,3488 4034,3490 2638,3567 2709,3569 4652,3712 2948,3727 2512.54,3750 2512.54,3802 4279,3846 3299,4072 3362,4123 3287,4327 3785,4393 3538,4580 3435,4581
IF: C32.2 R32.2 U5.4 U6.3 | length 939.3
  Top Layer w10: 3556,4261 U5.4@3620,4261
  Top Layer w20: U6.3@3042,3959 3073,3959 ; U6.3@3043.64,3951.37 cw(c3062.06,3932.95) 3062.06,3959 ; U6.3@3047.28,3974.68 ccw(c3073,3987.94) 3073,3959 ; 3320.67,4206.67 ccw(c3275.8,4251.54) R32.2@3339.25,4251.54 ; R32.2@3335.82,4244.57 ccw(c3347.15,4258.03) R32.2@3359.59,4245.59 ; R32.2@3348.7,4259.87 ccw(c3361.24,4274.76) 3375,4261 ; C32.2@3409.61,4246.32 ccw(c3375,4212.86) 3375,4261 ; C32.2@3420.3,4246.23 cw(c3455.95,4210.58) 3455.95,4261 ; 3557,4261 3375,4261 ; 3073,3959 3375,4261
MGND: C29.2 C37.1 L3.2 P3.3 P3.7 pad.0@3332,2539 pad.0@4152,2541 Q7.2 R39.1 Z1.A | length 4865.9
  Top Layer w50: C29.2 2691.4,2372.4 ; Z1.A@2820.44,2652.05 cw(c2773.22,2604.83) 2840,2604.83 ; Z1.A@2820.44,2677.95 ccw(c2773.22,2725.17) 2840,2725.17 ; L3.2 2840,2521 2691.4,2372.4 ; P3.3@3312.3,2295.92 cw(c3252.66,2236.28) 3337,2236.28 ; 3335,2210 3337,2212 P3.3@3337,2323 ; 3337,2239.29 cw(c3417.09,2239.29) P3.3@3360.46,2295.92 ; P3.7@4112.3,2295.92 cw(c4054.16,2237.78) 4136.38,2237.78 cw(c4218.59,2237.78) P3.7@4160.46,2295.92 ; 4134,2199 4136.38,2201.38 P3.7 ; v1@4551.96,2821 cw(c4551.96,2764.47) Q7.2@4591.92,2804.44 ; C37.1@4554,2201 4550,2197 2708,2197 2691.4,2213.6 2691.4,2372.4 ; Q7.2@4591,2788 R39.1@4591,2859 ; 4591,2821 v1(4545,2821) ccw(c4545,2874.12) R39.1@4595.3,2857.02
  Bottom Layer w50: P3.3@3312.3,2344.08 ccw(c3243,2413.37) 3341,2413.37 ; pad.0@3321.39,2528.39 cw(c3274.06,2481.06) 3341,2481.06 ; P3.3@3341,2326 pad.0@3341,2529 ; 3341,2391.06 ccw(c3407.44,2391.06) P3.3@3360.46,2344.08 ; P3.7@4112.3,2344.08 ccw(c4043,2413.37) 4141,2413.37 ; P3.7@4141,2318 4141,2478 4203,2540 4333,2540 4545,2752 v1(4545,2821) ; 4141,2391.06 ccw(c4207.44,2391.06) P3.7@4160.46,2344.08 ; 4141,2478.23 cw(c4214.77,2478.23) 4162.61,2530.39 ccw(c4214.77,2478.23) 4141,2478.23
NetC2_2: C2.2 PIR.1 U1.1 U1.8 | length 1467.2
  Top Layer w30: v1@3646,3684 4356,3684 4455,3585 U1.8@4455,3530 ; 3858.53,3684 cw(c3858.53,3641.99) C2.2@3888.23,3671.7 ; C2.2@3891.77,3671.7 cw(c3921.47,3641.99) 3921.47,3684 ; U1.1@4214,3530 4214,3678 ; 4214,3546.31 ccw(c4244.31,3546.31) U1.1@4222.88,3524.88
  Bottom Layer w30: PIR.1 3554.29,3586.29 3650,3682 v1(3652,3682)
NetC5_2: C5.2 R3.1 U1.3 | length 343.1
  Top Layer w24: R3.1@4020,3427 U1.3 ; R3.1@4026.11,3434.65 ccw(c4044.58,3453.12) 4044.58,3427 ; 4042.9,3427 ccw(c4042.9,3501.83) C5.2@4095.81,3448.92 ; C5.2@4114.19,3448.92 ccw(c4167.1,3501.83) 4167.1,3427
NetC16_1: C16.1 CE5.1 L1.2 L8.2 R27.1 | length 491.4
  Top Layer w20: R27.1@2724.77,3645.7 cw(c2737.57,3632.89) 2737.57,3651 cw(c2737.57,3669.11) R27.1@2724.77,3656.3 ; 2849.2,3651 cw(c2849.2,3624.2) C16.1@2868.15,3643.15 ; 2854.03,3651 ccw(c2854.03,3670.97) C16.1@2868.15,3656.85
  Top Layer w30: R27.1 C16.1@2871,3651
  Top Layer w60: 2833,3818 2971,3818 cw(c2970.99,3990.14) CE5.1@2848.2,3869.5
NetC29_1: C29.1 D3.2 L2.2 Z1.K | length 786.5
  Top Layer w50: C29.1@2581,2549 2581,2634 2734,2787 L2.2@2734,2830 ; C29.1@2581,2591.23 cw(c2674.77,2591.23) v1@2608.46,2657.54 ; 2581,2617.11 cw(c2625.17,2617.11) v1@2610.32,2658.71 ; 2715.45,2768.45 ccw(c2656.17,2827.72) L2.2 ; Z1.K@3006,2665 D3.2@3185,2665 ; Z1.K@3031.37,2652.05 cw(c3062.62,2620.8) 3062.62,2665 cw(c3062.62,2709.2) Z1.K@3031.37,2677.95
  other v1: 2612,2654 3080,2665 3124,2665 2645,2690
NetC30_1: C30.1 D18.2 L1.1 U8.6
NetC30_2: C30.2 U8.1 | length 82
  Top Layer w40: U8.1@2636,3472 C30.2@2718,3472
NetD2_4: D2.4 R20.2 | length 765.3
  Top Layer w15: 3085.44,2832 cw(c3085.44,2795.75) D2.4@3111.07,2821.38 ; 3095.1,2832 ccw(c3095.1,2854.59) D2.4@3111.07,2838.62 ; D2.4@3139,2832 3066,2832 3041,2857 3041,3297 3094,3350 R20.2 ; R20.2@3150.7,3344.17 ccw(c3136.62,3330.09) 3136.62,3350 ccw(c3136.62,3369.91) R20.2@3150.7,3355.83
NetD2_5: D2.5 R21.2 | length 611.3
  Top Layer w15: 3081.84,2904.16 ccw(c3099.98,2922.29) D2.5@3113.34,2900.4 ; 3095.32,2890.68 ccw(c3110.19,2905.55) D2.5@3121.15,2887.6 ; D2.5@3109.56,2883.22 ccw(c3095,2873.49) 3095,2891 ; D2.5@3110.52,2898.03 cw(c3095,2911.64) 3095,2891 ; D2.5@3140,2891 3095,2891 ; R21.2@3150.7,3254.17 ccw(c3136.62,3240.09) 3136.62,3260 ccw(c3136.62,3279.91) R21.2@3150.7,3265.83 ; R21.2 3121,3260 3070,3209 3070,2916 3095,2891
NetD2_6: D2.6 R23.2 | length 501.7
  Top Layer w15: 3099,2993.14 ccw(c3162.83,2993.14) D2.6@3117.69,2948.01 ; 3099,3029.36 ccw(c3199.04,3029.36) D2.6@3128.3,2958.62 ; 3099.84,2968.16 ccw(c3115.04,2983.35) D2.6@3118,2962.07 ; D2.6@3100.08,2967.92 cw(c3082.15,2950) D2.6@3107.5,2950 ; D2.6@3139,2951 3117,2951 3099,2969 3099,3147 3122,3170 R23.2@3166,3170 ; R23.2@3150.7,3164.17 ccw(c3136.62,3150.09) 3136.62,3170 ccw(c3136.62,3189.91) R23.2@3150.7,3175.83
NetD3_1: D3.1 R25.1 | length 92.5
  Top Layer w50: D3.1 3341.74,2668 R25.1@3430,2668
NetL2_1: L2.1 L5.1 | length 220.9
  Top Layer w50: L5.1 2660,2958 2705.72,2912.28 L2.1 cw(c2740,2995.03) 2681.49,2936.51
NetL3_1: L3.1 L5.3 | length 384.9
  Top Layer w50: L5.3@2734.8,3012.44 cw(c2734.8,2904.39) 2811.21,2980.79 ; L5.3@2734.9,3012.45 cw(c2746.84,2936.68) 2801.08,2990.92 ; L5.3@2738,3013 2779,3013 2840,2952 L3.1 ccw(c2756.17,2917.28) 2815.45,2976.55
NetLED1_1: LED1.1 R22.2 | length 95.5
  Top Layer w20: LED1.1@3388,4450 R22.2
NetP9_1: P9.1 R53.1 | length 446.1
  Top Layer w20: P9.1@2762.19,4686.19 cw(c2728.86,4652.86) 2776,4652.86 cw(c2823.14,4652.86) P9.1@2789.81,4686.19 ; R53.1@2776,4363 P9.1 ; 2776,4384.07 ccw(c2820.6,4384.07) R53.1@2789.06,4352.53
NetP9_3: P9.3 R51.1 | length 460.4
  Top Layer w20: P9.3@2555.23,4679.23 cw(c2495.44,4619.44) 2580,4619.44 ; R51.1@2580,4349 P9.3@2580,4698 ; 2580,4638.75 cw(c2637.25,4638.75) P9.3@2596.77,4679.23
NetPIR_2: PIR.2 R2.2 R3.2 R4.2 | length 325.2
  Top Layer w24: PIR.2 3958.5,3399.29
  Top Layer w30: R3.2 3958.5,3371 R4.2
NetQ3_1: Q3.1 R29.2 | length 98.3
  Top Layer w30: Q3.1@4364,2723 4454.5,2723 R29.2
NetQ3_3: Q3.3 U3.2 | length 194.7
  Top Layer w20: U3.2@4127,2760 Q3.3@4270,2760 ; U3.2@4134.63,2750.37 cw(c4157.89,2727.11) 4157.89,2760 cw(c4157.89,2792.89) U3.2@4134.63,2769.63
NetQ7_1: Q7.1 R35.2 R39.2 | length 255.9
  Top Layer w20: R35.2@4589,2937 4589,2932 4655,2866 Q7.1@4655,2785 ; R35.2@4596.22,2940 ccw(c4632.97,2940) 4606.98,2914.02 ; 4631.6,2889.4 cw(c4602.21,2860) R39.2@4643.78,2860 ; R39.2@4649.4,2855.94 cw(c4635.88,2842.42) 4655,2842.42
NetQ7_3: Q7.3 R34.1 | length 118.4
  Top Layer w20: R34.1@4605,2617 4620,2632 Q7.3 ; R34.1@4606.41,2624.06 ccw(c4573.59,2656.88) 4620,2656.88
NetQ9_1: Q9.1 R12.1 | length 103.5
  Top Layer w20: R12.1 Q9.1@4330,3045
NetQ9_3: Q9.3 R5.1 R13.1 | length 361.6
  Top Layer w20: Q9.3 R13.1@4583.5,3005 ; 4560.59,3005 ccw(c4560.59,3035.95) R13.1@4582.47,3014.06 ; R13.1 4588.5,3024.5 4649,3085 R5.1@4649,3095 ; R13.1@4596.22,3010 cw(c4649.87,3010) 4611.93,3047.93 ; 4628.02,3064.02 ccw(c4602.03,3090) R5.1@4638.78,3090
NetQM1_1: QM1.1 R31.1 R34.2 | length 335.5
  Top Layer w20: R31.1@4669.4,2495.94 cw(c4643.81,2470.34) 4680,2470.34 ; R31.1@4669.4,2504.06 ccw(c4643.81,2529.66) 4680,2529.66 ; R34.2@4669.4,2615.94 cw(c4643.81,2590.35) 4680,2590.35 ; QM1.1@4671.95,2407.7 ccw(c4652.5,2427.15) 4680,2427.15 ; R34.2@4676,2625 4680,2621 QM1.1@4680,2398
NetR6_1: R6.1 U1.5 | length 1232.1
  Top Layer w15: v1@4363,3377 U1.5 ; v1@4372.84,3366.16 cw(c4399.01,3339.99) 4399.01,3377 ; v1@4372.84,3383.84 ccw(c4389.35,3400.35) 4389.35,3377
  Top Layer w20: R6.1@4030,4180 v1@4077,4180 ; 4052.44,4180 cw(c4052.44,4152.44) v1@4071.93,4171.93 ; 4057.27,4180 ccw(c4057.27,4200.73) v1@4071.93,4186.07
  Bottom Layer w15: v1@4076,4180 4099,4157 4099,3814 4364,3549 v1(4364,3375) ; v1@4079,4166.5 cw(c4079,4141.15) 4096.92,4159.08 ; v1@4091.4,4177.39 ccw(c4114.41,4174.41) 4098,4158 ; v1@4355.16,3383.84 ccw(c4333.82,3405.18) 4364,3405.18 ccw(c4394.18,3405.18) v1@4372.84,3383.84
  other v1: 4079,4179
NetR8_1: R8.1 U1.6 | length 1168.8
  Top Layer w15: v1@4312.5,3451.5 4334,3430 U1.6@4449,3430 ; v1@4313,3439.5 cw(c4313,3411.74) 4332.63,3431.37 ; v1@4325.48,3451.36 ccw(c4352.94,3449.94) 4333.5,3430.5 ; 4408.89,3430 cw(c4408.89,3408.89) U1.6@4423.82,3423.82
  Top Layer w20: R8.1 4044,4085 v1(4047,4082) ; 4015.62,4085 cw(c4015.62,4050.62) v1@4039.93,4074.93
  Bottom Layer w15: v1@4038.16,4073.16 cw(c4016.82,4051.82) 4047,4051.82 cw(c4077.18,4051.82) v1@4055.84,4073.16 ; v1(4047,4082) 4047,3780 4301,3526 4301,3460 4309,3452 v1(4313,3452) ; 4301,3474.93 ccw(c4335.94,3474.93) v1@4311.23,3450.23 ; 4301,3511.15 ccw(c4372.15,3511.15) v1@4321.84,3460.84
NetR24_1: R24.1 U3.1 | length 305.1
  Top Layer w20: U3.1@4121,2648 4294,2648 ; U3.1@4134.63,2635.37 cw(c4165.13,2604.87) 4165.13,2648 ; U3.1@4134.63,2654.63 ccw(c4150.64,2670.64) 4150.64,2648 ; 4224.2,2648 cw(c4224.2,2572.67) R24.1@4277.47,2625.94 ; 4272.49,2648 cw(c4272.49,2620.95) R24.1@4291.61,2640.08
NetR27_2: R27.2 R30.1 U8.3 | length 346.7
  Top Layer w20: U8.3 2550.6,3566.6 2585,3601 2585,3654 R30.1@2588,3651 ; R30.1@2574.16,3645.7 cw(c2547.99,3619.53) 2585,3619.53 ; R30.1@2584.77,3645.7 cw(c2597.57,3632.89) 2597.57,3651 cw(c2597.57,3669.11) R30.1@2584.77,3656.3 ; R27.2@2647.23,3645.7 ccw(c2634.43,3632.89) 2634.43,3651 ccw(c2634.43,3669.11) R27.2@2647.23,3656.3
  Top Layer w30: R30.1@2588,3651 R27.2
NetR56_2: R56.2 U8.4 | length 138.4
  Top Layer w40: R56.2@2539,3279 2539,3390 ; 2539,3368.1 cw(c2556.45,3368.1) U8.4@2544.11,3380.45 ; 2539,3385.82 cw(c2556.45,3385.82) U8.4@2544.11,3398.16
NORMAL_OPEN: P8.1 R5.2 | length 282.5
  Top Layer w20: P8.1@4546.19,3206.19 cw(c4474.23,3134.23) 4576,3134.23 ; P8.1@4560.33,3220.33 cw(c4522.51,3182.51) 4576,3182.51 ; P8.1@4562,3219 4576,3205 R5.2@4576,3090 ; 4576,3117.24 ccw(c4608.78,3117.24) R5.2@4585.6,3094.06
PIR_DATA: R8.2 U5.3 | length 654.3
  Top Layer w10: U5.3 U5.3@3623.54,4280.63 ; U5.3@3623.54,4281 3658,4281 3671,4268 3671,4162 3667,4158 v1@3672,4153 ; v1@3661.39,4160.61 ccw(c3638.2,4183.8) 3671,4183.8 ; 3671,4188.63 ccw(c3710.63,4188.63) v1@3682.61,4160.61 ; v1@3877,4084 v1(3878,4085)
  Top Layer w15: v1(3672,4150) v1@3672,4153
  Top Layer w20: v1(3878,4085) R8.2 ; v1@3885.07,4077.93 cw(c3902.14,4060.86) 3902.14,4085 cw(c3902.14,4109.14) v1@3885.07,4092.07
  Bottom Layer w15: v1@3672,4132 v1(3672,4150)
  Bottom Layer w20: v1@3672,4132 3719,4085 v1(3878,4085) ; v1@3682,4150 ccw(c3749.6,4150) 3701.8,4102.2 ; v1@3870.93,4077.93 ccw(c3853.86,4060.86) 3853.86,4085 ccw(c3853.86,4109.14) v1@3870.93,4092.07
PIR_P: C3.2 R4.1 U1.4 | length 322.8
  Top Layer w24: R4.1@4024,3377 U1.4 ; R4.1@4027.11,3367.35 cw(c4050.41,3344.05) 4050.41,3377 ; 4060.04,3377 cw(c4060.04,3317.51) C3.2@4102.11,3359.57 ; C3.2@4092.92,3376.55 cw(c4094.02,3375.45) C3.2@4094.02,3377 ; C3.2@4109.89,3359.57 cw(c4151.96,3317.51) 4151.96,3377 ; C3.2@4117.98,3377 cw(c4117.98,3375.45) C3.2@4119.08,3376.55
TAMPER+: P3.1 pad.0@2940,2539 TAM1.1 | length 5461.7
  Bottom Layer w20: P3.1@2901.69,2285.31 cw(c2817.95,2201.57) 2936.38,2201.57 cw(c3054.81,2201.57) P3.1@2971.07,2285.31 ; P3.1@2901.69,2354.69 ccw(c2817.95,2438.43) 2936.38,2438.43 ccw(c3054.81,2438.43) P3.1@2971.07,2354.69 ; P3.1@2915.83,2299.45 cw(c2866.23,2249.85) 2936.38,2249.85 cw(c3006.52,2249.85) P3.1@2956.92,2299.45 ; P3.1@2915.83,2340.55 ccw(c2866.23,2390.15) 2936.38,2390.15 ccw(c3006.52,2390.15) P3.1@2956.92,2340.55 ; pad.0@2918.79,2517.79 cw(c2876.32,2475.32) 2936.38,2475.32 ; 2936.38,2457.83 cw(c3021.17,2457.83) pad.0@2961.21,2517.79 ; pad.0@2936.38,2531.38 2936.38,2184.62 2956,2165 4666,2165 4762,2261 4762,4245 4715,4292 4618,4292 4427,4101 ; TAM1.1@4375,4101 4427,4101 ; TAM1.1@4396.96,4114.5 ccw(c4427,4141.16) 4427,4101 ; TAM1.1@4402.32,4084.21 cw(c4427,4074.46) 4427,4101
TAMPER-: P3.2 pad.0@3134,2534 TAM1.2@4375,4295 | length 4944
  Bottom Layer w20: P3.2@3101.69,2354.69 ccw(c3017.95,2438.43) 3136.38,2438.43 ccw(c3254.81,2438.43) P3.2@3171.07,2354.69 ; pad.0@3112.79,2512.79 cw(c3055.83,2455.83) 3136.38,2455.83 ; P3.2@3115.83,2340.55 ccw(c3066.23,2390.15) 3136.38,2390.15 ccw(c3206.52,2390.15) P3.2@3156.92,2340.55 ; P3.2@3119.22,2274.04 cw(c3109.12,2246.98) 3138,2246.98 ; P3.2 pad.0@3136.38,2522.38 ; 3136.38,2467.31 cw(c3200.69,2467.31) pad.0@3155.21,2512.79 ; P3.2@3138,2319 3138,2247 ; P3.2@3156.32,2275.18 ccw(c3168.86,2246.98) 3138,2246.98 ; TAM1.2@4335.86,4279 ccw(c4335.86,4312.51) TAM1.2@4366.45,4298.83 ; TAM1.2@4348.19,4306.99 cw(c4305,4326.31) 4305,4279 ; TAM1.2@4373,4279 4305,4279 ; 3138,2247 3178,2207 4636,2207 4710,2281 4710,3930.93 4661.93,3979 4312,3979 4259,4032 4259,4233 4305,4279
TX: LED1.2 P2.2 R6.2 U5.2 | length 1892.6
  Top Layer w10: LED1.2@3316.43,4442.93 cw(c3299.36,4425.86) 3323.5,4425.86 cw(c3347.65,4425.86) LED1.2@3330.57,4442.93 ; LED1.2@3323.5,4445 3323.5,4407.5 3346,4385 3464,4385 3548.68,4300.31 U5.2 ; U5.2@3620,4300 3689,4300 3713,4276 v1(3713,4200) ; v1@3702.39,4210.61 ccw(c3676.79,4236.21) 3713,4236.21 ccw(c3749.21,4236.21) v1@3723.61,4210.61
  Top Layer w20: LED1.2@3323,4449 3323,4639 3440,4756 3674,4756 3703,4727 ; 3684.79,4745.21 cw(c3661.03,4721.45) P2.2@3688.04,4701.46 ; 3685.02,4744.98 cw(c3637.59,4697.56) P2.2@3704.21,4689.79 ; P2.2@3692.16,4705.57 ccw(c3676.39,4727) 3703,4727 ; 3701.2,4728.8 cw(c3679.9,4707.49) P2.2@3704.12,4689.56 ; P2.2@3703,4684 3703,4727 ; P2.2@3714.31,4706.26 cw(c3727.66,4727) 3703,4727 ; v1@3919,4180 R6.2 ; v1@3922.07,4171.93 cw(c3941.56,4152.44) 3941.56,4180 ; v1@3922.07,4186.07 ccw(c3936.73,4200.73) 3936.73,4180
  Bottom Layer w15: v1@3706,4197 v1@3706,4203
  Bottom Layer w20: v1@3713,4190 cw(c3713,4153.79) 3738.61,4179.39 ; v1@3715,4203 3738,4180 v1@3917,4180 ; 3888.44,4180 cw(c3888.44,4152.44) v1@3907.93,4171.93 ; 3893.27,4180 ccw(c3893.27,4200.73) v1@3907.93,4186.07
  other v1: 3915,4179
VCC3.3: C1.2 C20.2 C23.2 C24.2 pad.0@4477,3654 U1.7 U4.3 | length 1637.1
  Top Layer w30: 4430.25,3895.25 cw(c4455.58,3869.91) U4.3@4467.66,3903.65 ; 4439.52,3904.52 cw(c4467.37,3876.66) U4.3@4471.12,3915.88 ; U1.7 4573,3477 ; 4451.87,3682.13 ccw(c4571.11,3801.38) C24.2@4580.19,3632.99 ; U4.3@4465,3909 4444,3909 4417,3882 4417,3717 4578,3556 C20.2@4578,3552 ; 4468.08,3665.92 ccw(c4521,3718.84) v1@4521,3644 ; 4478.86,3655.14 ccw(c4546.28,3722.55) C24.2@4577.45,3632.45 ; 4499.42,3634.58 ccw(c4575.97,3711.14) C24.2@4581.8,3603.03 ; v1@4512.76,3621.24 ccw(c4563.71,3672.19) C24.2@4587.26,3604.1 ; 4522.39,3477 cw(c4522.39,3395.85) C1.2@4579.77,3453.23 ; v1@4526,3639 ccw(c4600.84,3639) 4547.92,3586.08 ; 4549.32,3584.68 cw(c4497.63,3533) C20.2@4570.72,3533 ; C20.2@4573.65,3525.93 cw(c4549.87,3502.15) 4583.5,3502.15 ; C20.2@4573.65,3540.07 ccw(c4549.87,3563.85) 4583.5,3563.85 ; C24.2@4573.65,3615.93 cw(c4549.87,3592.15) 4583.5,3592.15 ; C23.2 C24.2@4583.5,3625.5
  other v1: 4521,3639
WAVE_LED: R20.1 U5.7 | length 1228.9
  Top Layer w10: R20.1@3223.46,3350.75 ccw(c3223.46,3375.57) 3241.02,3358.02 ; R20.1@3223.46,3360.75 ccw(c3223.46,3409.72) 3258.09,3375.09 ; R20.1@3232.5,3349.5 3276,3393 3276,3669 3748,4141 3748,4249 3759.94,4260.94 U5.7@3801,4260.94
pads on no net: TAM1.2@4375,4495

## Polygon pours and split planes (outlines as drawn)
GND on Top Layer "TopLayer-No Net 4" (solid, pour order 1003): 3739,3461 3824,3546 4290,3546 4290,3276 4115,3276 3806,3276 3739,3343 3739,3461
GND on Top Layer "TopLayer-No Net 4" (solid, remove dead copper, pour order 1004): 2942,4820 4198,4820 4201,4817 4205,4813 4205,3913 2944,3913 2942,3915 2942,4820
GND on Bottom Layer "TopLayer-No Net 4" (solid, remove dead copper, pour order 1002): 4806.89,2881.39 4799.89,2874.39 2437.89,2874.39 2437.89,4880.39 2436.89,4881.39 2465.89,4852.39 4800.89,4852.39 4800.89,2881.34

## Keep-outs
Keep-Out Layer:
  circle w11.81: c2600,2840.16 r68.9
  circle w11.81: c4647.24,4100 r68.9
  circle w11.81: c2600,4100 r72.44
  lines w10: 2445,4848.05 2445,2125 4805,2125 4805,4848.05 ; 2445,4848.05 4805,4848.05 ; 2445,4848.05 4805,4848.05

## Other copper
Top Layer:
  region net NetC2_2: 4171,3684 4258,3684 4217,3643 4212,3643
  region net GND: 2737,3600 2621,3600 2577,3556 2577,3490 2599,3490 2599,3513 2610,3524 2732,3524 2749,3541 2749,3588
  region net NetC16_1: 2782,3862 2783,3863 2881,3863 2881,3504 2786,3504 2786,3860 2781,3865
  region net NetC30_1: 2955,3415 2961,3409 2961,3255 2862,3255 2859,3258 2859,3304 2823,3340 2637,3340 2614,3363 2614,3415
  region net +12V_LDO: 2758,3252 2701,3252 2682,3233 2672,3243 2672,3276 2758,3276
  region net +12V_LDO: 2577,3387 2577,3323 2591,3309 2591,3138 2631,3098 2686,3098 2686,3262 2599,3349 2599,3387
  region net GND: 2717,3217 2780,3217 2892,3105 2892,3050 2821,3050 2717,3154
  region net +12V: 3513,2518 3481,2486 3481,2324 3587,2324 3590,2327 3590,2417 3617,2444 4544,2444 4580,2408 4622,2408 4622,2518
  region net +12VOUT: 4332,2260 4647,2260 4663,2276 4663,2338 4654,2347 4332,2347
Bottom Layer:
  pour cut-out: 2990,3607 2990,3350 2768,3350 2768,3607
  region net NetC29_1: 3123,2715 3151,2687 3151,2645 3130,2624 2604,2624 2583,2645 2583,2696 2602,2715
  pour cut-out: 2445,2829 4805,2829 4805,2125 2445,2125

## Silkscreen, mask and mechanical layers (free items; w line width, h text height)
Top Overlay:
  circle w20: c3548,4345 r17.2
  circle w11.8: c4235.75,3569 r20.25
  circle w11.8: c2656.23,3509 r10.77
  circle w200: c3625,3470 r100
  circle w11.81: c2938.69,2320 r91.31
  circle w20: c4204.59,2635 r30.41
  circle w20: c3410.59,2810 r30.41
  region: 3377,3498 3445,3498 3445,3444 3377,3444
  lines w10: 3636,4511 3636,4559
  lines w20: 3080,2590 3080,2760 ; 3115,2600 3115,2755 ; 4499,4034 4669,4593
  text "10S" at 2703,4770 h60
  text "20S" at 2500,4769 h60
  text "0S" at 2843,4689 h60
  text "MEI-AN-Detector-V3.0-1.2mm" at 4776,4038 h60 r90
  text "Micro-Wave Module" at 3120,3979 h60
  text "NO" at 4486,3290 h50
  text "NC" at 4371,3288 h50
  text "ALM-" at 3871,2533 h50
  text "+12V-OUT" at 4224,2533 h50
  text "ALM+" at 3659,2529 h50
  text "+12V" at 3423,2528 h60
  text "GND" at 4067,2523 h50
  text "TAM+" at 2840,2520 h50
  text "TAM-" at 3050,2520 h50
  text "GND" at 3259,2520 h50
Bottom Overlay:
  lines w20: 4485,2598 4485,2728
  text "3.3V" at 3554,4657 h60
  text "3.3V_LD" at 3356,4571 h60
  text "3.3V_PIR" at 4408,3644 h60
  text "GND" at 4629,3403 h60
  text "ALM-" at 3940,2860 h50 r90
  text "ALM+" at 3760,2855 h50 r90
  text "GND" at 4150,2815 h50 r90
  text "GND" at 3330,2800 h50 r90
  text "+12V-OUT" at 4575,2750 h50
  text "TAM-" at 3225,2740 h50
  text "+12V" at 3640,2740 h60
  text "TAM+" at 3000,2730 h50

## Text inside footprints (layer, text, board x,y; h text height)
LED1: Top Overlay "+" at 3453.43,4469.69 h39.37 r180
PIR: Top Overlay "D" at 3482,3122 h100; Top Overlay "G" at 3699,3699 h100; Top Overlay "S" at 3773,3224 h100 r180
U6: Top Overlay "V" at 3000,4200 h78.74